# EAGLE board TimeDrawingRobot (EAGLE 8.3.2)

Size 99.06 x 77.47 mm. Coordinates in mm from the lower left corner, seen from the top.
Outline: 0,0 99.06,0 99.06,77.47 0,77.47 0,0
Copper layers (1*16): Top 0.035mm / dielectric 1.5mm / Bottom 0.035mm
Design rules "default": minimum track width 6mil, minimum drill 0.35mm, track to track 6mil, track to pad 6mil, pad to pad 6mil, via to via 6mil, smd to smd 6mil, copper to edge 40mil, drill to drill 6mil, minimum pad ring 10mil, minimum via ring 8mil, stop-mask expansion 4mil, vias tented up to drill 0mil, thermal gap 10mil

## Footprints (pad centres in the part's own frame; a part is rotated, then mirrored left to right if it is on the bottom)
1X04 = drill 1.016 long: 1 -3.81,0; 2 -1.27,0; 3 1.27,0; 4 3.81,0
1X08 = drill 1.016 long: 1 -8.89,0; 2 -6.35,0; 3 -3.81,0; 4 -1.27,0; 5 1.27,0; 6 3.81,0; 7 6.35,0; 8 8.89,0
1X15 = drill 1.016 long: 1 -17.78,0; 2 -15.24,0; 3 -12.7,0; 4 -10.16,0; 5 -7.62,0; 6 -5.08,0; 7 -2.54,0; 8 0,0; 9 2.54,0; 10 5.08,0; 11 7.62,0; 12 10.16,0; 13 12.7,0; 14 15.24,0; 15 17.78,0
1X01 = drill 1.016 octagon: 1 0,0
1X03 = drill 1.016 long: 1 -2.54,0; 2 0,0; 3 2.54,0

## Placement (x,y rotation side)
CLEANER  [1X04]  43.18,15.24 90 top
CLEANER_A  [1X08]  24.13,21.59 180 top
CLEANER_B  [1X08]  24.13,8.89 180 top
E$7  [1X15]  22.86,72.39 0 top
E$8  [1X15]  22.86,46.99 180 top
IN+  [1X01]  76.2,34.29 0 top
IN-  [1X01]  76.2,15.24 0 top
INNER  [1X04]  46.99,34.29 90 top
INNER_A  [1X08]  24.13,27.94 180 top
INNER_B  [1X08]  24.13,40.64 180 top
OUT+  [1X01]  92.71,34.29 0 top
OUT-  [1X01]  92.71,15.24 0 top
OUTER  [1X04]  59.69,34.29 90 top
OUTER_A  [1X08]  57.15,8.89 180 top
OUTER_B  [1X08]  57.15,21.59 180 top
POWER  [1X03]  5.08,25.4 90 top
RTC_EMPTY  [1X04]  73.66,72.39 180 top
RTC_I2C  [1X04]  73.66,46.99 180 top

## Library data of the parts
CLEANER CLEANER_A CLEANER_B E$7 E$8 IN+ IN- INNER INNER_A INNER_B OUT+ OUT- OUTER OUTER_A OUTER_B POWER RTC_EMPTY RTC_I2C = pinhead

## Text on the board
Dimension: +